# Altium PCB PCB21.pcbdoc
Units mil, origin at the board's own origin, x right, y up, seen from the top; angles counter-clockwise.
Board outline 1480 x 1220 mil, 2 copper layers (Top Layer, Bottom Layer); 5 components, 5 nets, 17 pads, 5 vias.
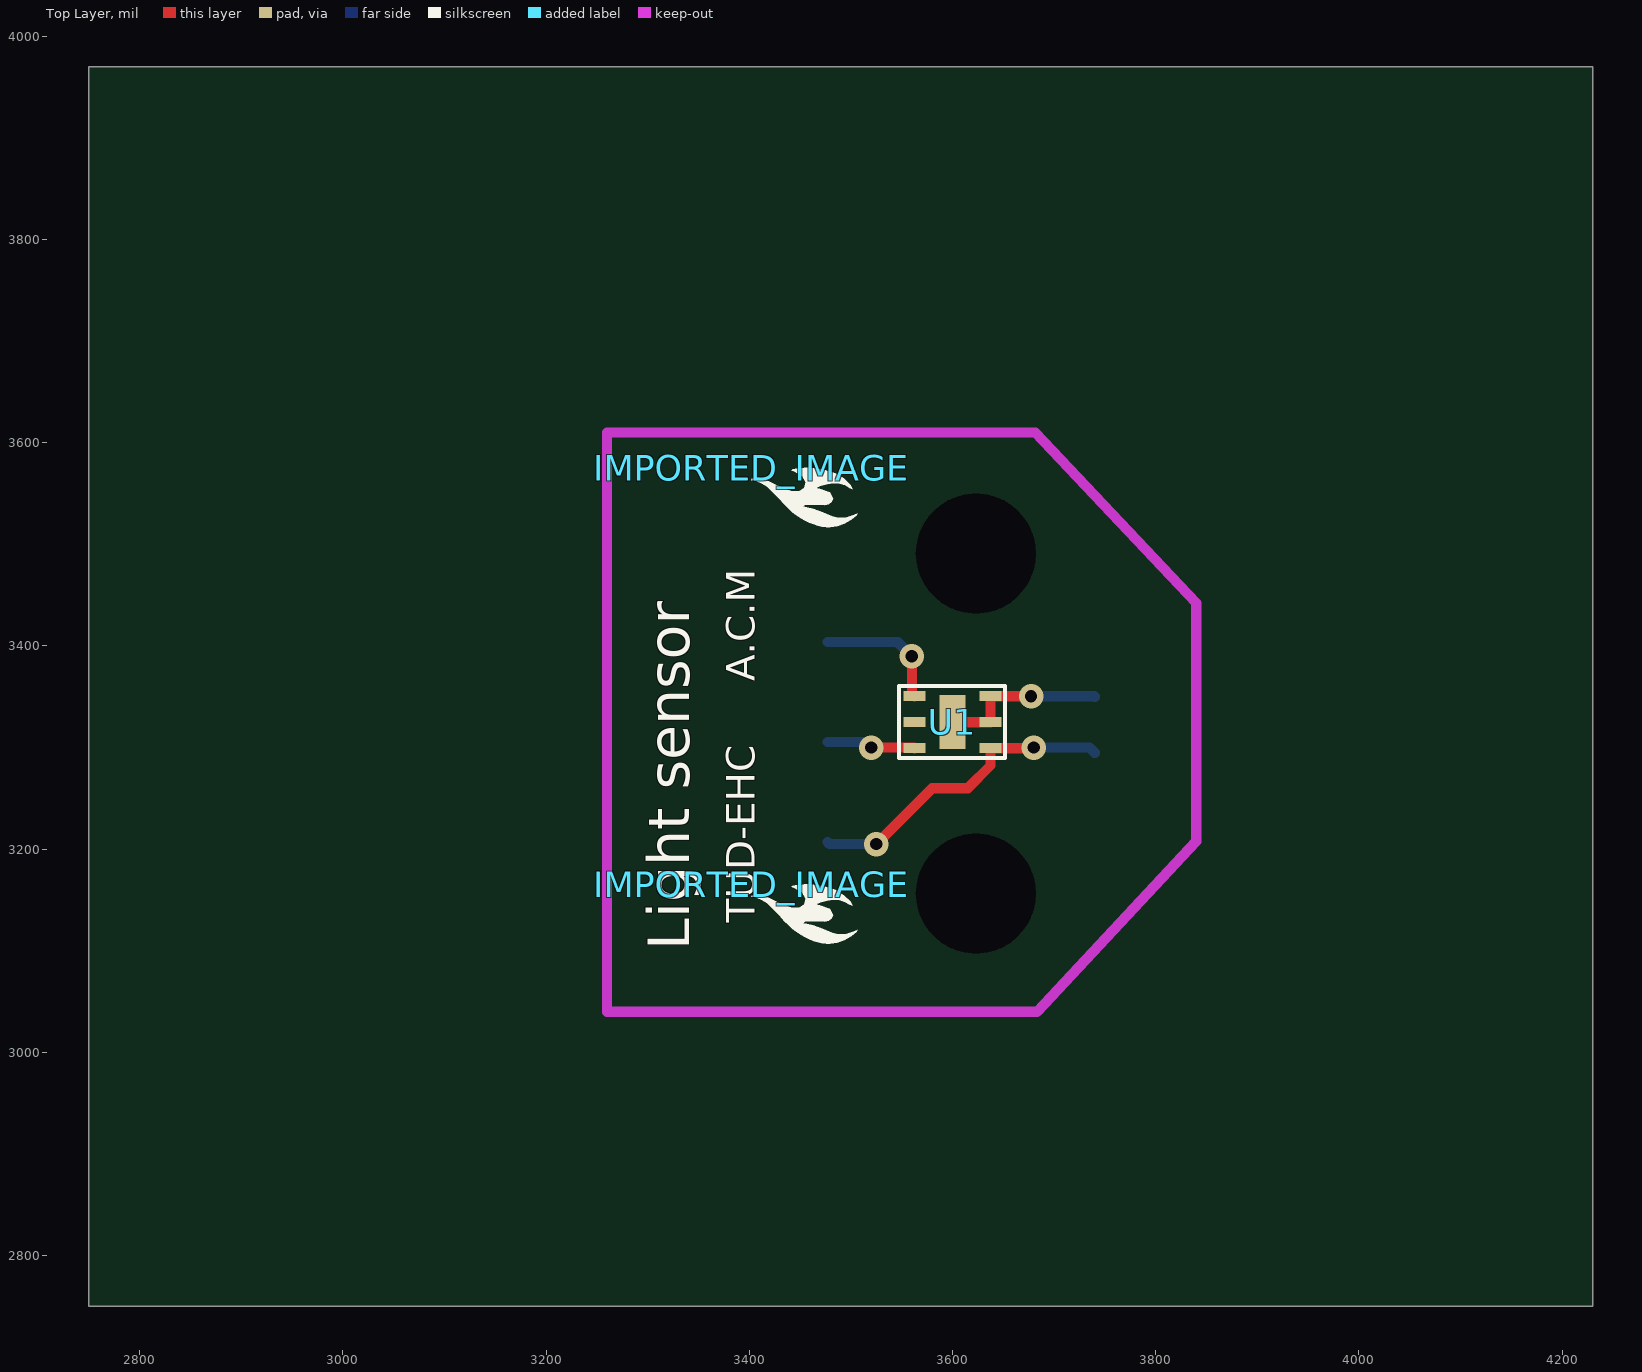
[diagram p0: Top Layer view]
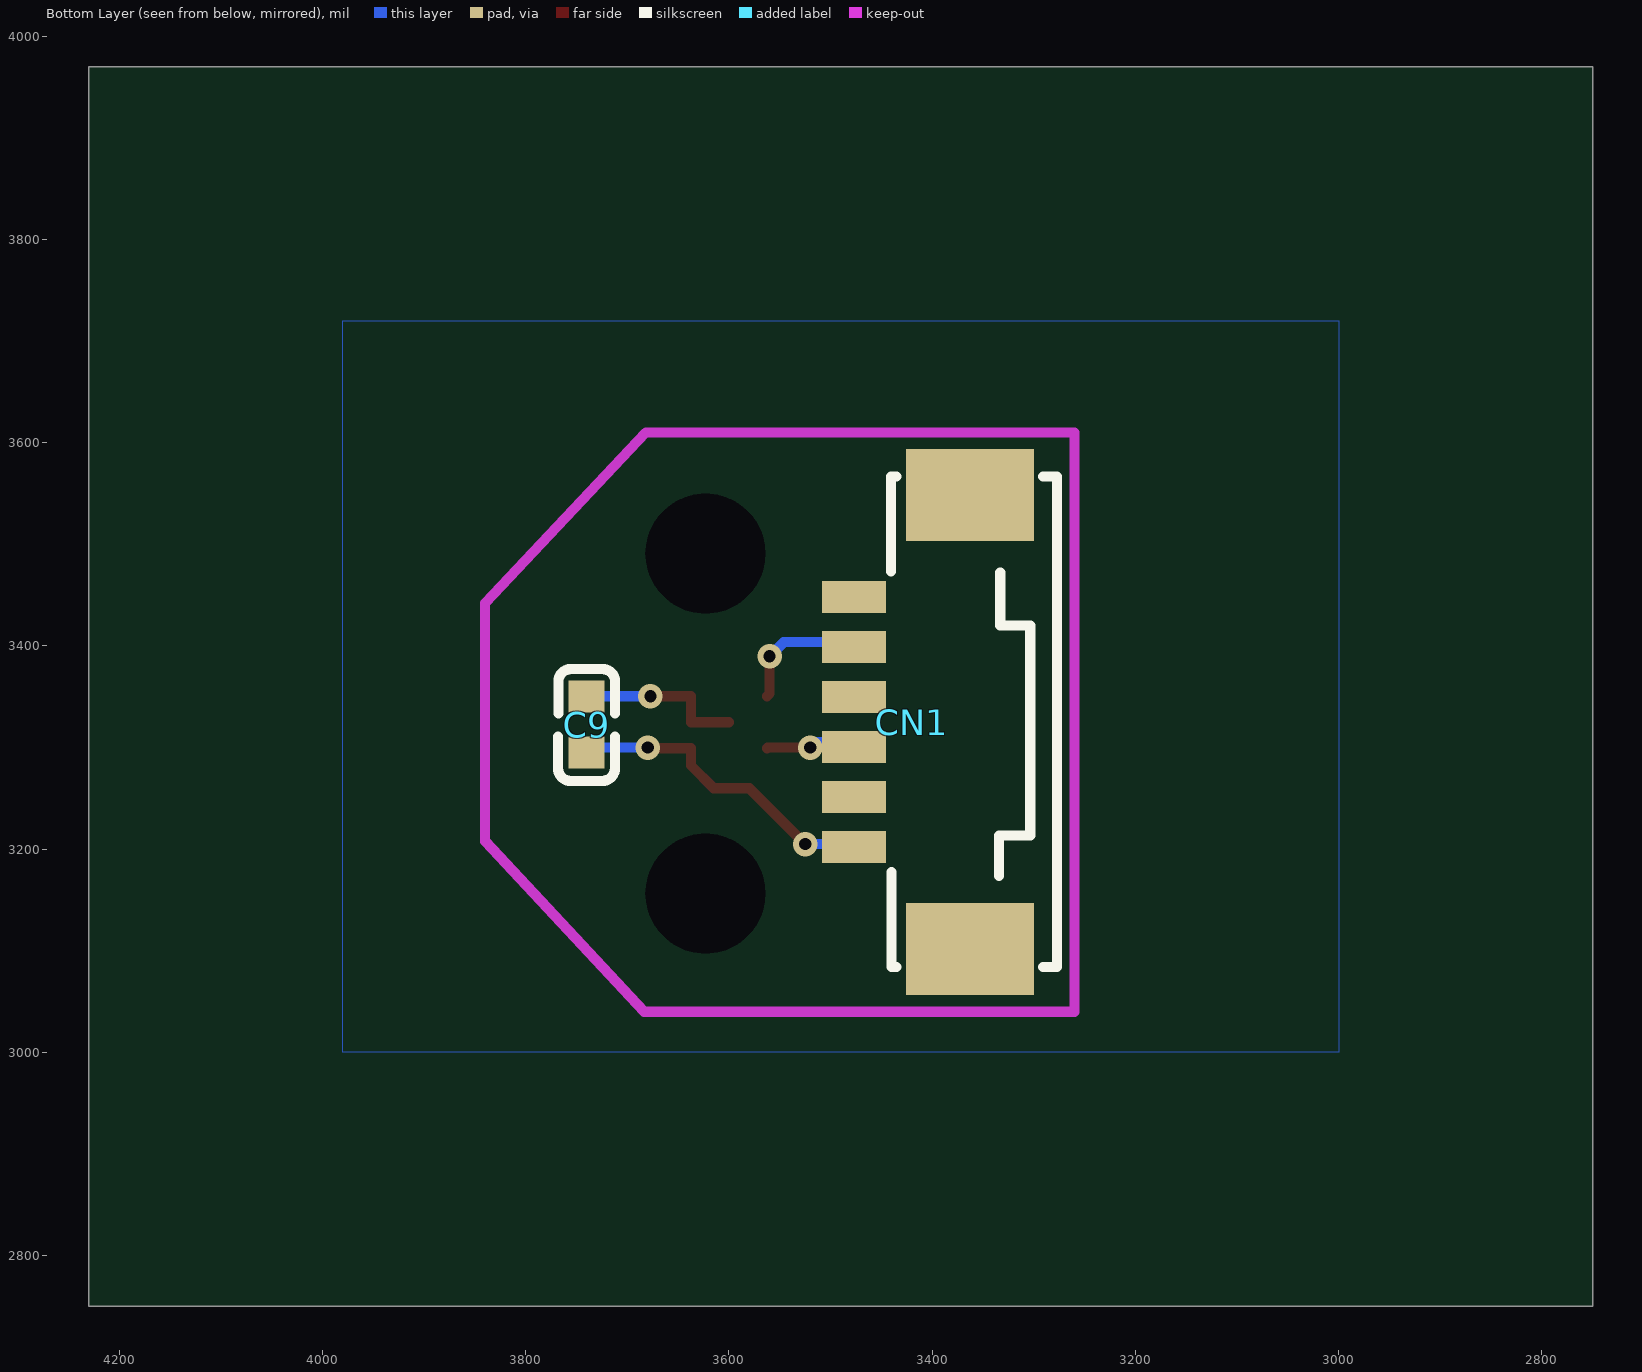
[diagram p1: Bottom Layer view, seen from below]

## Layer stack, top to bottom
Top Layer: signal copper (thickness not stored)
Dielectric: dielectric 12.6, FR-4, Dk 4.8
Bottom Layer: signal copper (thickness not stored)

## Board outline
4230,2750 2750,2750 2750,3970 4230,3970
cut-out: 3682.17,3490.94 ccw(c3623.11,3490.94) 3564.06,3490.94 ccw(c3623.11,3490.94)
cut-out: 3682.17,3156.3 ccw(c3623.11,3156.3) 3564.06,3156.3 ccw(c3623.11,3156.3)

## Components (designator, comment, footprint, x,y, rotation, side; value= is the part's Value field where it differs from the comment)
C9 "100nF" C0603 3740,3322.55 r90 bottom
CN1 "532610671" CONN-SMD_6P-P1.25_53261-0671 3420,3325 r90 bottom
IMPORTED_IMAGE "IMPORTED_IMAGE" IMPORTED_IMAGE 3402.13,3165.33 r0 top
IMPORTED_IMAGE "IMPORTED_IMAGE" IMPORTED_IMAGE 3402.13,3575.33 r0 top
U1 "OPT3001DNPR" USON6_L2.1-W2.1-P0.65-BL-EP 3600.01,3325 r90 top

## Footprints (in the part's own frame and the unit in brackets; to place one, negate y for a bottom-side part, rotate by r counter-clockwise, add the part's x,y. Pads: shape width x height; smd on the part's side, far side on the other; paste and mask are expansions set on the pad)
C0603 [mm]
  rect 0.8x0.9 smd paste+0 mask+0.051: 1(-0.7,0) 2(0.7,0)
  silkscreen extent -1.41,-0.71 1.39,0.72
CONN-SMD_6P-P1.25_53261-0671 [mm]
  rect 0.8x1.6 smd paste+0 mask+0.051: 1(3.125,1.45) 2(1.875,1.45) 3(0.625,1.45) 4(-0.625,1.45) 5(-1.875,1.45) 6(-3.125,1.45)
  rect 2.3x3.2 smd paste+0 mask+0.051: 7(-5.675,-1.45) 8(5.675,-1.45)
  silkscreen extent -6.12,-3.63 6.14,0.52
IMPORTED_IMAGE [mil]
  silkscreen extent 0,-58 105,0
USON6_L2.1-W2.1-P0.65-BL-EP [mm]
  rect 0.25x0.55 smd paste+0 mask+0.051: 1(-0.65,-0.95) 2(0,-0.95) 3(0.65,-0.95) 4(0.65,0.95) 5(0,0.95) 6(-0.65,0.95)
  rect 1.35x0.65 smd paste+0 mask+0.051: 7(0,0)
  silkscreen extent -0.89,-1.31 0.91,1.34

## Via types
v1: diameter 24.02, hole 12.01, Top Layer to Bottom Layer, 5 vias

## Nets (pads, with @x,y where several pads share a name; then routed paths per layer and width w, separated by ;. In a path a pad name is that pad's centre, name@x,y a point inside that pad or via, vN(x,y) a via of type N, cw(c..) or ccw(c..) an arc to the next point about the centre after c; other vN are vias at no path point)
GND: C9.2 CN1.1 U1.2 U1.3 U1.7 | length 165.8
  Top Layer w10: U1.7 U1.2 U1.3 v1(3677.35,3350.59)
  Bottom Layer w10: v1(3677.35,3350.59) 3739.52,3350.59 C9.2
LUX.SCL: CN1.2 U1.4 | length 129.1
  Top Layer w10: v1(3560,3390) 3560,3353.19 U1.4
  Bottom Layer w10: CN1.2@3477.09,3403.82 3546.18,3403.82 v1(3560,3390)
LUX.SDA: CN1.4 U1.6 | length 88
  Top Layer w10: v1(3520,3300) 3562.01,3300 U1.6
  Bottom Layer w10: CN1.4@3477.09,3305.39 3514.61,3305.39 v1(3520,3300)
SYS_1V8: C9.1 CN1.6 U1.1 | length 315.1
  Top Layer w10: v1(3525,3205) 3580,3260 3615,3260 3637.41,3282.41 U1.1 3679.41,3299.41 v1(3680,3300)
  Bottom Layer w10: CN1.6@3477.09,3206.96 3479.05,3205 v1(3525,3205) ; v1(3680,3300) 3735,3300 C9.1
"": CN1.3 CN1.5 CN1.7 CN1.8 U1.5

## Polygon pours and split planes (outlines as drawn)
GND on Bottom Layer (solid, remove dead copper, pour order 0): 3000,3000 3980,3000 3980,3720 3000,3720

## Keep-outs
Board Outline Layer:
  lines w10 net "": 3260,3040 3683.33,3040 3840,3207.86 3840,3442.35 3681.67,3610 3260,3610 3260,3040

## Silkscreen, mask and mechanical layers (free items; w line width, h text height)
Top Silkscreen Layer:
  text "A.C.M" at 3405.39,3365.13 h28.11 r90
  text "TUD-EHC" at 3405.39,3127.66 h28.11 r90
  text "Light sensor" at 3341.02,3100.35 h40.88 r90
Mechanical Layer:
  circle w1 net "": c3623.11,3490.94 r59.06
  circle w1 net "": c3623.11,3156.3 r59.06